# Altium PCB VSON-10_L3.0-W3.0-P0.50-TL-EP.pcbdoc
Units mm, origin at the board's own origin, x right, y up, seen from the top; angles counter-clockwise.
Board outline 32.96 x 29.08 mm, 2 copper layers (Top Layer, Bottom Layer); 1 components, 0 nets, 11 pads, 0 vias.
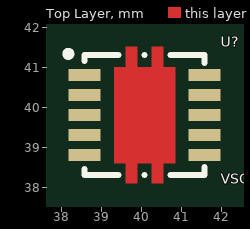
[diagram p0: Top Layer view]
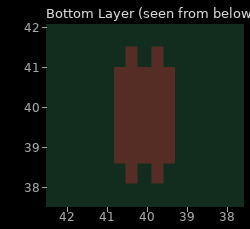
[diagram p1: Bottom Layer view, seen from below]

## Layer stack, top to bottom
Top Layer: signal copper (thickness not stored)
Dielectric: dielectric 0.32, FR-4, Dk 4.8
Bottom Layer: signal copper (thickness not stored)

## Board outline
58.363,25.4 25.4,25.4 25.4,54.479 58.363,54.479

## Components (designator, comment, footprint, x,y, rotation, side; value= is the part's Value field where it differs from the comment)
U? "VSON-10_L3.0-W3.0-P0.50-TL-EP" VSON-10_L3.0-W3.0-P0.50-TL-EP 40.04,39.813 r0 top

## Footprints (in the part's own frame and the unit in brackets; to place one, negate y for a bottom-side part, rotate by r counter-clockwise, add the part's x,y. Pads: shape width x height; smd on the part's side, far side on the other; paste and mask are expansions set on the pad)
VSON-10_L3.0-W3.0-P0.50-TL-EP [mm]
  rect 0.8x0.3 smd: 1(-1.46,1.006) 2(-1.46,0.506) 3(-1.46,0.006) 4(-1.46,-0.494) 5(-1.46,-0.994) 6(1.54,-0.994) 7(1.54,-0.494) 8(1.54,0.006) 9(1.54,0.506) 10(1.54,1.006)
  round 0 smd: 11(0.041,-0.003)
  Top Layer region: -0.719,1.197 -0.429,1.197 -0.429,1.713 -0.139,1.713 -0.139,1.197 0.221,1.197 0.221,1.713 0.511,1.713 0.511,1.197 0.801,1.197 0.801,-1.203 0.511,-1.203 0.511,-1.708 0.221,-1.708 0.221,-1.203 -0.139,-1.203 -0.139,-1.708 -0.429,-1.708 -0.429,-1.203 -0.719,-1.203 -0.719,0.892 -0.719,0.893 -0.719,0.893 -0.719,0.893
  silkscreen extent -1.94,-1.5 1.54,1.61

## Nets (pads, with @x,y where several pads share a name; then routed paths per layer and width w, separated by ;. In a path a pad name is that pad's centre, name@x,y a point inside that pad or via, vN(x,y) a via of type N, cw(c..) or ccw(c..) an arc to the next point about the centre after c; other vN are vias at no path point)
pads on no net: U?.1 U?.2 U?.3 U?.4 U?.5 U?.6 U?.7 U?.8 U?.9 U?.10 U?.11